# EAGLE board Beton Ajek - Dirouting Faris (EAGLE 9.6.2)
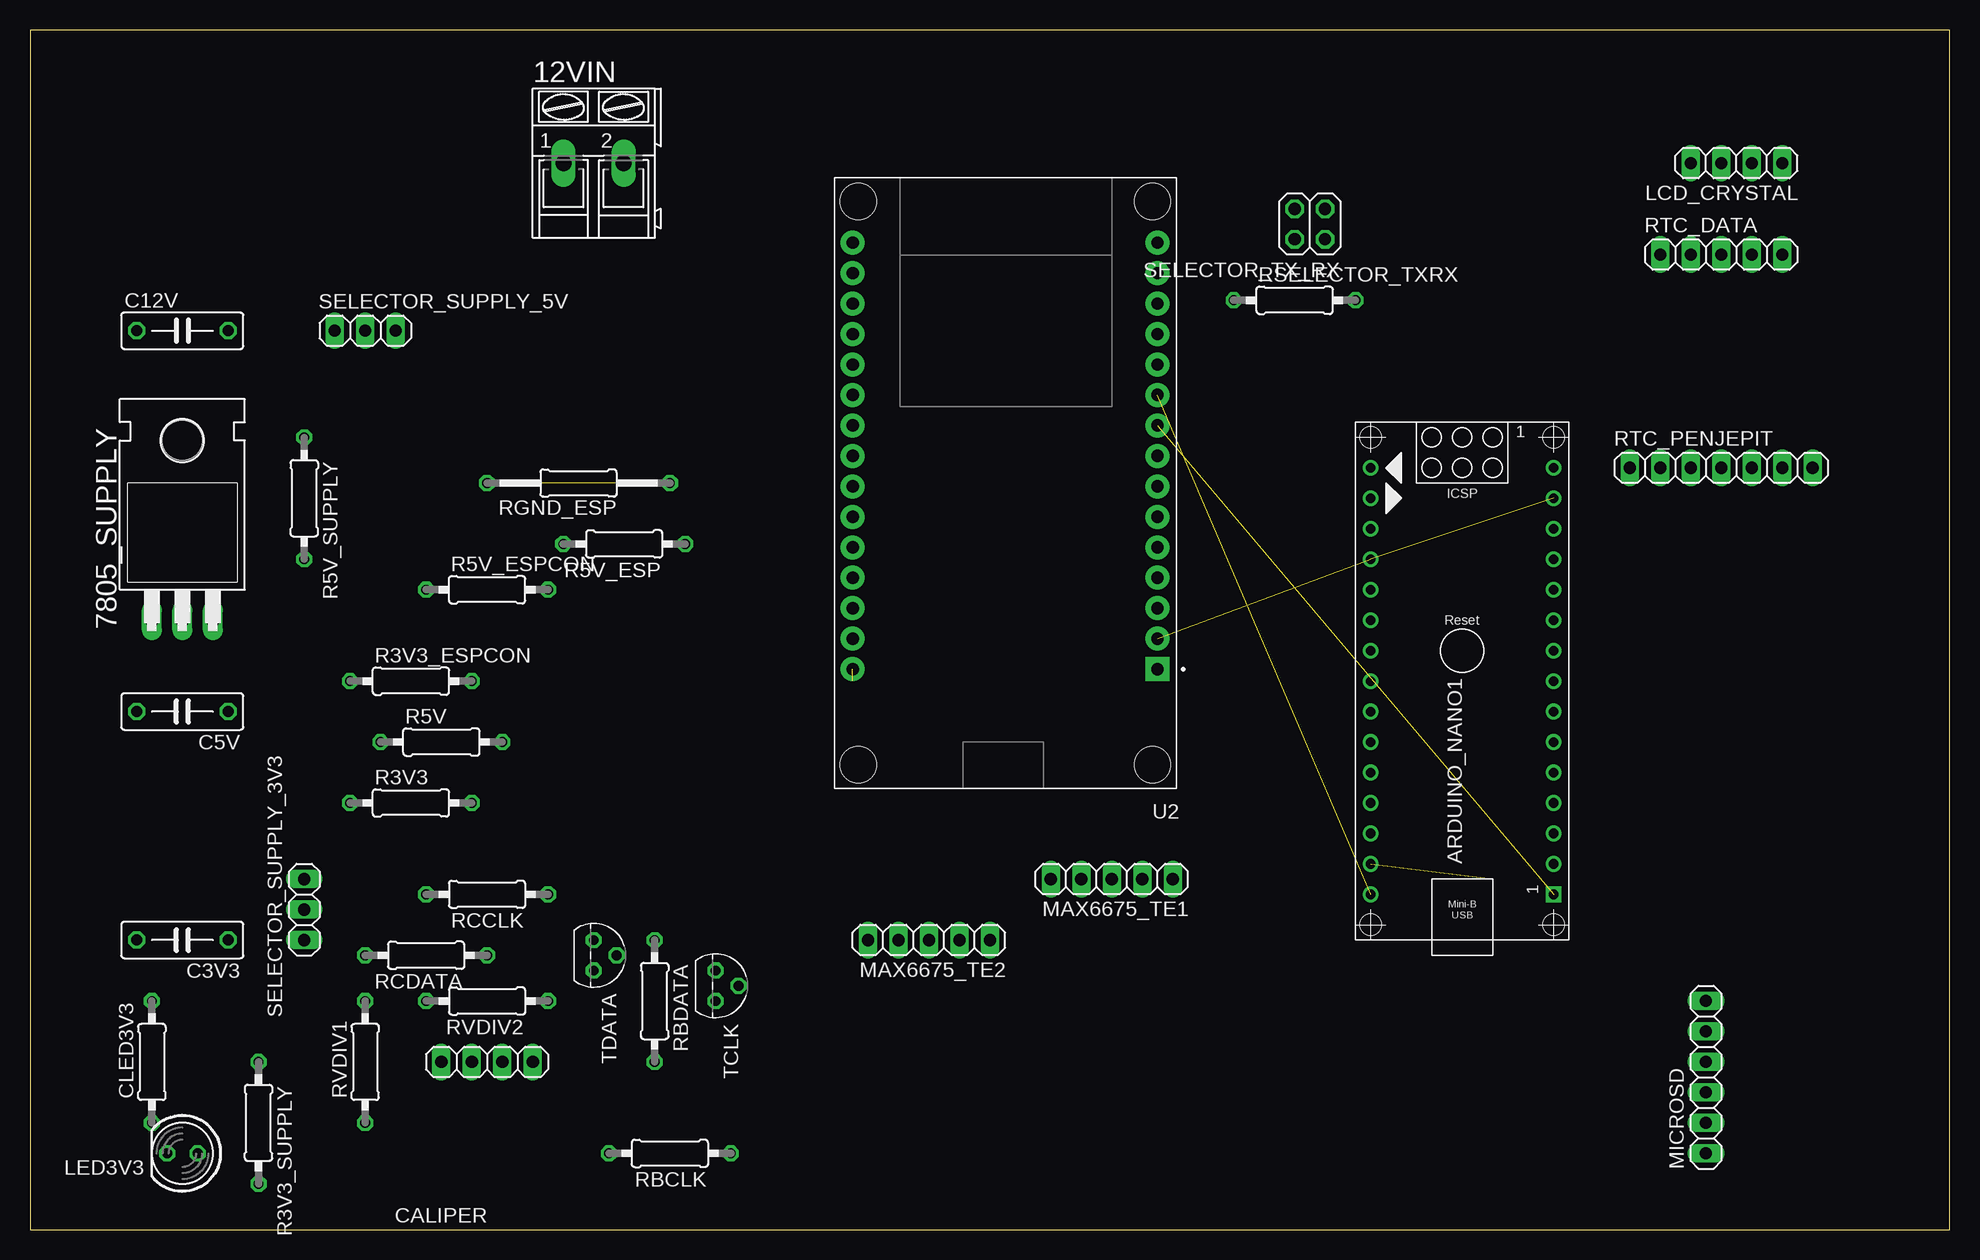
[diagram p0: board, top side]
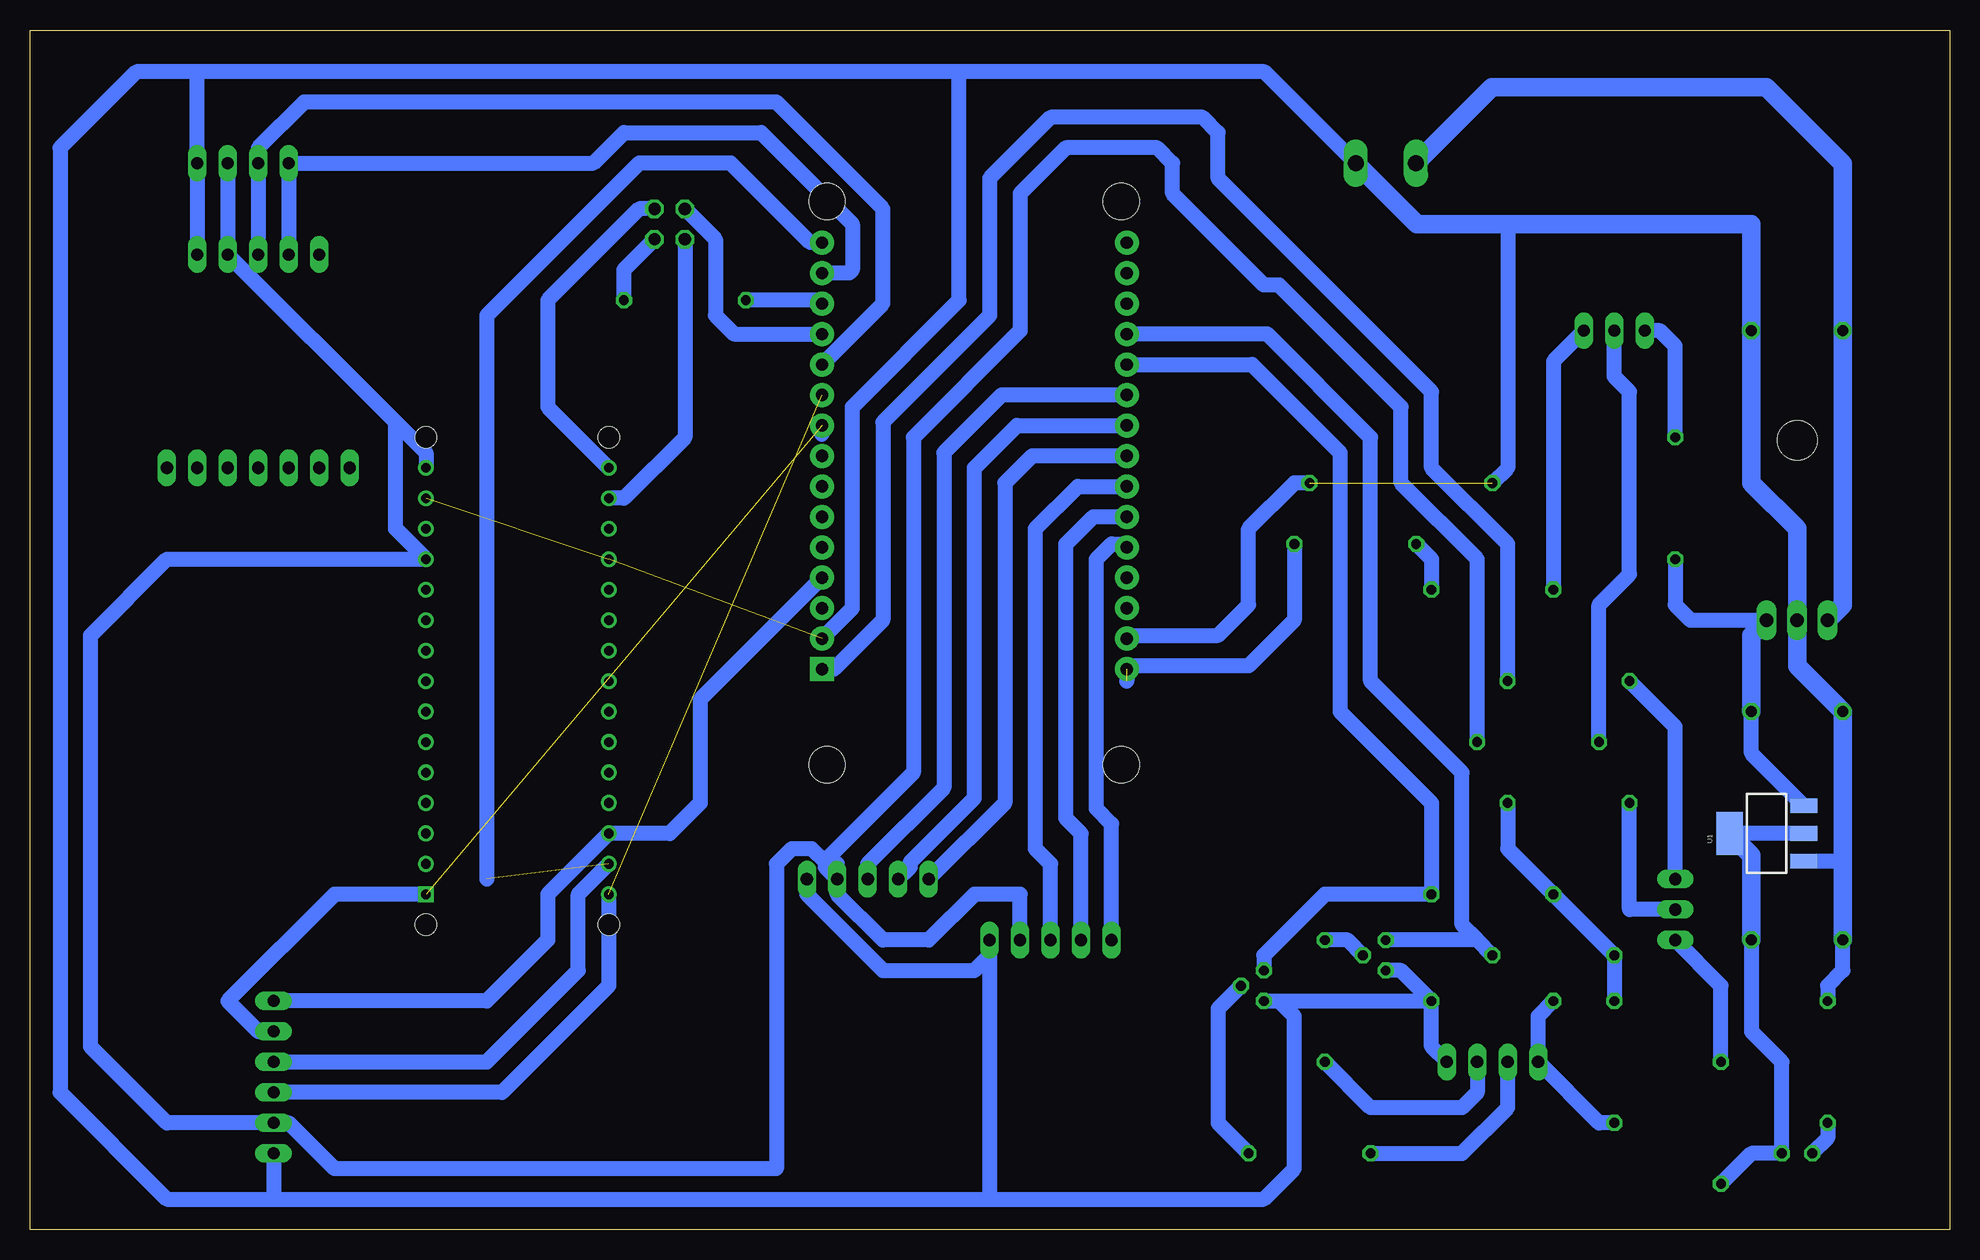
[diagram p1: board, bottom side, seen from below]

Size 160 x 100 mm. Coordinates in mm from the lower left corner, seen from the top.
Outline: 0,0 160,0 160,100 0,100 0,0
Copper layers (1*16): Top 0.035mm / dielectric 1.5mm / Bottom 0.035mm
Design rules "default": minimum track width 6mil, minimum drill 0.35mm, track to track 6mil, track to pad 6mil, pad to pad 6mil, via to via 6mil, smd to smd 6mil, copper to edge 40mil, drill to drill 6mil, minimum pad ring 10mil, minimum via ring 8mil, stop-mask expansion 4mil, vias tented up to drill 0mil, thermal gap 10mil

## Footprints (pad centres in the part's own frame; a part is rotated, then mirrored left to right if it is on the bottom)
AK300/2 = drill 1.321 long: 1 -2.515,0; 2 2.489,0
TO220H = drill 1.118 long: 1 -2.54,-10.16; 2 0,-10.16; 3 2.54,-10.16 | hole 3.302: 0,4.826
ARDUINO_NANO = drill 0.8 square: 1 -20.32,-7.62 | drill 0.8: 2 -17.78,-7.62; 3 -15.24,-7.62; 4 -12.7,-7.62; 5 -10.16,-7.62; 6 -7.62,-7.62; 7 -5.08,-7.62; 8 -2.54,-7.62; 9 0,-7.62; 10 2.54,-7.62; 11 5.08,-7.62; 12 7.62,-7.62; 13 10.16,-7.62; 14 12.7,-7.62; 15 15.24,-7.62; 16 15.24,7.62; 17 12.7,7.62; 18 10.16,7.62; 19 7.62,7.62; 20 5.08,7.62; 21 2.54,7.62; 22 0,7.62; 23 -2.54,7.62; 24 -5.08,7.62; 25 -7.62,7.62; 26 -10.16,7.62; 27 -12.7,7.62; 28 -15.24,7.62; 29 -17.78,7.62; 30 -20.32,7.62 | hole 1.778: -22.86,-7.62; -22.86,7.62; 17.78,7.62; 17.78,-7.62
C075-032X103 = drill 0.914 octagon: 1 -3.81,0; 2 3.81,0
1X04 = drill 1.016 long: 1 -3.81,0; 2 -1.27,0; 3 1.27,0; 4 3.81,0
0207/10 = drill 0.813 octagon: 1 -5.08,0; 2 5.08,0
LED5MM = drill 0.813 octagon: A -1.27,0; K 1.27,0
1X05 = drill 1.016 long: 1 -5.08,0; 2 -2.54,0; 3 0,0; 4 2.54,0; 5 5.08,0
1X06 = drill 1.016 long: 1 -6.35,0; 2 -3.81,0; 3 -1.27,0; 4 1.27,0; 5 3.81,0; 6 6.35,0
0207/15 = drill 0.813 octagon: 1 -7.62,0; 2 7.62,0
1X07 = drill 1.016 long: 1 -7.62,0; 2 -5.08,0; 3 -2.54,0; 4 0,0; 5 2.54,0; 6 5.08,0; 7 7.62,0
1X03 = drill 1.016 long: 1 -2.54,0; 2 0,0; 3 2.54,0
2X02 = drill 1.016 octagon: 1 -1.27,-1.27; 2 -1.27,1.27; 3 1.27,-1.27; 4 1.27,1.27
TO92 = drill 0.813 octagon: 1 1.27,0; 2 0,1.905; 3 -1.27,0
SOT223 = smd 1.219 x 2.235: 1 -2.311,-3.099; 2 0,-3.099; 3 2.311,-3.099 | smd 3.6 x 2.2: 4 0,3.099
MODULE_ESP32_DEVKIT_V1 = drill 1.02 pad 2 square: 1 -12.7,15.515 | drill 1.02 pad 2: 2 -12.7,12.975; 3 -12.7,10.435; 4 -12.7,7.895; 5 -12.7,5.355; 6 -12.7,2.815; 7 -12.7,0.275; 8 -12.7,-2.265; 9 -12.7,-4.805; 10 -12.7,-7.345; 11 -12.7,-9.885; 12 -12.7,-12.425; 13 -12.7,-14.965; 14 -12.7,-17.505; 15 -12.7,-20.045; 16 12.7,-20.045; 17 12.7,-17.505; 18 12.7,-14.965; 19 12.7,-12.425; 20 12.7,-9.885; 21 12.7,-7.345; 22 12.7,-4.805; 23 12.7,-2.265; 24 12.7,0.275; 25 12.7,2.815; 26 12.7,5.355; 27 12.7,7.895; 28 12.7,10.435; 29 12.7,12.975; 30 12.7,15.515 | hole 3: -12.28,-23.475; 12.23,-23.475; 12.23,23.475; -12.28,23.475

## Placement (x,y rotation side)
12VIN  [AK300/2]  46.99,88.9 0 top
7805_SUPPLY  7805T  [TO220H]  12.7,60.96 0 top
ARDUINO_NANO1  [ARDUINO_NANO]  119.38,48.26 90 top
C3V3  [C075-032X103]  12.7,24.13 180 top
C5V  [C075-032X103]  12.7,43.18 180 top
C12V  [C075-032X103]  12.7,74.93 0 top
CALIPER  [1X04]  38.1,13.97 0 top
CLED3V3  [0207/10]  10.16,13.97 90 top
LCD_CRYSTAL  [1X04]  142.24,88.9 180 top
LED3V3  [LED5MM]  12.7,6.35 180 top
MAX6675_TE1  [1X05]  90.17,29.21 180 top
MAX6675_TE2  [1X05]  74.93,24.13 180 top
MICROSD  [1X06]  139.7,12.7 90 top
R3V3  0R  [0207/10]  31.75,35.56 0 top
R3V3_ESPCON  0R  [0207/10]  31.75,45.72 0 top
R3V3_SUPPLY  0R  [0207/10]  19.05,8.89 270 top
R5V  0R  [0207/10]  34.29,40.64 0 top
R5V_ESP  0R  [0207/10]  49.53,57.15 180 top
R5V_ESPCON  0R  [0207/10]  38.1,53.34 0 top
R5V_SUPPLY  0R  [0207/10]  22.86,60.96 270 top
RBCLK  [0207/10]  53.34,6.35 180 top
RBDATA  [0207/10]  52.07,19.05 270 top
RCCLK  [0207/10]  38.1,27.94 180 top
RCDATA  [0207/10]  33.02,22.86 180 top
RGND_ESP  0R  [0207/15]  45.72,62.23 180 top
RSELECTOR_TXRX  0R  [0207/10]  105.41,77.47 0 top
RTC_DATA  [1X05]  140.97,81.28 0 top
RTC_PENJEPIT  [1X07]  140.97,63.5 0 top
RVDIV1  [0207/10]  27.94,13.97 90 top
RVDIV2  [0207/10]  38.1,19.05 180 top
SELECTOR_SUPPLY_3V3  [1X03]  22.86,26.67 90 top
SELECTOR_SUPPLY_5V  [1X03]  27.94,74.93 0 top
SELECTOR_TX_RX  [2X02]  106.68,83.82 180 top
TCLK  BC547  [TO92]  57.15,20.32 270 top
TDATA  BC547  [TO92]  46.99,22.86 270 top
U1  [SOT223]  15.24,33.02 90 bottom
U2  ESP32-DEVKIT-V1  [MODULE_ESP32_DEVKIT_V1]  81.28,62.23 180 top

## Library data of the parts
12VIN = con-ptr500
7805_SUPPLY = adafruit
ARDUINO_NANO1 = ArduinoNanoV30
C3V3 C5V C12V = rcl; SPICEPREFIX: C
CALIPER LCD_CRYSTAL MAX6675_TE1 MAX6675_TE2 MICROSD RTC_DATA RTC_PENJEPIT SELECTOR_SUPPLY_3V3 SELECTOR_SUPPLY_5V SELECTOR_TX_RX = pinhead
CLED3V3 R3V3 R3V3_ESPCON R3V3_SUPPLY R5V R5V_ESP R5V_ESPCON R5V_SUPPLY RBCLK RBDATA RCCLK RCDATA RGND_ESP RSELECTOR_TXRX RVDIV1 RVDIV2 = rcl; SPICEPREFIX: R
LED3V3 = led
TCLK TDATA = transistor
U1 = SparkFun-IC-Power; PROD_ID: VREG-08170
U2 = ESP32-DEVKIT-V1; AVAILABILITY: Not in stock; DESCRIPTION: Dual core, Wi-Fi: 2.4 GHz up to 150 Mbits/s,BLE (Bluetooth Low Energy) and legacy Bluetooth, 32 bits, Up to 240 MHz; MF: Do it; MP: ESP32-DEVKIT-V1; PACKAGE: None; PRICE: None

## Nets
1V5: CALIPER.1 RVDIV1.1 RVDIV2.2
3V3: R3V3.2 RCCLK.2 RCDATA.2 RVDIV1.2
3V3_ESP: R3V3_ESPCON.2 U2.1
3V3_SUPPLY: C3V3.1 LED3V3.A R3V3_SUPPLY.2 U1.2 U1.4
5V: ARDUINO_NANO1.12 ARDUINO_NANO1.15 LCD_CRYSTAL.2 MAX6675_TE1.2 MAX6675_TE2.2 MICROSD.2 R5V.2 RTC_DATA.4
5V_ESP: R5V_ESP.2 R5V_ESPCON.2
5V_SUPPLY: 7805_SUPPLY.3 C5V.1 R5V_SUPPLY.2 U1.3
CHIP_SELECT_USD: ARDUINO_NANO1.28 MICROSD.6 U2.4
CLK_CALIPER: RCCLK.1 TCLK.3 U2.20
CLK_IN: CALIPER.2 RBCLK.2
CS_TE1: MAX6675_TE1.4 U2.22
CS_TE2: MAX6675_TE2.4 U2.25
DATA_CALIPER: RCDATA.1 TDATA.3 U2.19
DATA_IN: CALIPER.3 RBDATA.2
GND: 12VIN.2 7805_SUPPLY.2 ARDUINO_NANO1.14 ARDUINO_NANO1.19 C3V3.2 C5V.2 C12V.2 CALIPER.4 CLED3V3.2 LCD_CRYSTAL.1 MAX6675_TE1.1 MAX6675_TE2.1 MICROSD.1 RGND_ESP.1 RGND_ESP.2 RTC_DATA.5 RVDIV2.1 TCLK.1 TDATA.1 U1.1 U2.2 U2.29
MISO_USD: ARDUINO_NANO1.30 MICROSD.3 U2.10
MOSI_USD: ARDUINO_NANO1.29 MICROSD.4 U2.15
N$1: 12VIN.1 7805_SUPPLY.1 C12V.1
N$2: RBCLK.1 TCLK.2
N$4: RSELECTOR_TXRX.2 SELECTOR_TX_RX.2
N$6: R5V_ESP.1 U2.30
N$7: R5V.1 SELECTOR_SUPPLY_5V.2
N$8: U2.16
N$9: U2.17
N$10: U2.18
N$11: R5V_SUPPLY.1 SELECTOR_SUPPLY_5V.1
N$12: U2.5
N$13: CLED3V3.1 LED3V3.K
N$14: R5V_ESPCON.1 SELECTOR_SUPPLY_5V.3
N$15: R3V3.1 SELECTOR_SUPPLY_3V3.2
N$16: R3V3_SUPPLY.1 SELECTOR_SUPPLY_3V3.1
N$17: U2.8
N$18: RBDATA.1 TDATA.2
N$19: U2.27
N$20: U2.28
N$21: R3V3_ESPCON.1 SELECTOR_SUPPLY_3V3.3
N$25: U2.3
N$39: U2.7
N$40: U2.6
N$52: RTC_DATA.1
RX_ESP: SELECTOR_TX_RX.3 U2.12
RX_NANO: ARDUINO_NANO1.17 SELECTOR_TX_RX.4
SCK_TE1: MAX6675_TE1.3 U2.21
SCK_TE2: MAX6675_TE2.3 U2.24
SCK_USD: ARDUINO_NANO1.1 MICROSD.5 U2.9
SCL: LCD_CRYSTAL.4 RTC_DATA.2 U2.14
SDA: LCD_CRYSTAL.3 RTC_DATA.3 U2.11
SO_TE1: MAX6675_TE1.5 U2.23
SO_TE2: MAX6675_TE2.5 U2.26
TX_ESP: RSELECTOR_TXRX.1 U2.13
TX_NANO: ARDUINO_NANO1.16 SELECTOR_TX_RX.1

## Tracks (layer width: path | path; a pad name or v marks a point on that pad's centre or on a via)
1V5
  Bottom 1.27: RVDIV1.1 29.21,8.89 CALIPER.1 34.29,17.78 RVDIV2.2
3V3
  Bottom 1.27: RVDIV1.2 RCDATA.2 RCCLK.2 36.83,31.75 R3V3.2
3V3_ESP
  Bottom 1.27: R3V3_ESPCON.2 36.83,57.15 43.18,63.5 43.18,69.85 60.96,87.63 60.96,91.44 62.23,92.71 74.93,92.71 80.01,87.63 80.01,76.2 88.9,67.31 88.9,50.8 92.98,46.72 U2.1
3V3_SUPPLY
  Bottom 1.27: U1.2 U1.4 | C3V3.1 16.51,16.51 13.97,13.97 LED3V3.A 16.51,6.35 R3V3_SUPPLY.2
  Bottom 1.524: C3V3.1 16.51,31.19 U1.4
5V
  Bottom 1.27: MAX6675_TE2.2 77.47,27.94 81.28,27.94 85.09,24.13 88.9,24.13 92.71,27.94 MAX6675_TE1.2 | 92.71,30.48 MAX6675_TE1.2 | MAX6675_TE1.2 93.7,30.2 93.7,30.61 | 93.7,30.61 94.84,31.75 96.52,31.75 97.79,30.48 97.79,5.08 134.62,5.08 138.43,8.89 MICROSD.2 148.59,8.89 154.94,15.24 154.94,49.53 148.59,55.88 ARDUINO_NANO1.12 129.54,58.42 129.54,67.31 | R5V.2 39.37,55.88 45.72,62.23 45.72,68.58 55.88,78.74 57.15,78.74 64.77,86.36 64.77,88.9 66.04,90.17 73.66,90.17 77.47,86.36 77.47,74.93 86.36,66.04 86.36,38.1 93.7,30.76 93.7,30.61 | LCD_CRYSTAL.2 RTC_DATA.4 129.54,67.31 | 129.54,67.31 127,64.77 ARDUINO_NANO1.15
5V_ESP
  Bottom 1.27: R5V_ESP.2 43.18,55.88 R5V_ESPCON.2
5V_SUPPLY
  Bottom 1.27: U1.3 16.51,39.7 C5V.1 | R5V_SUPPLY.2 22.86,52.07 21.59,50.8 7805_SUPPLY.3
  Bottom 1.524: C5V.1 16.51,49.53 7805_SUPPLY.3
CHIP_SELECT_USD
  Bottom 1.27: MICROSD.6 121.92,19.05 116.84,24.13 116.84,27.94 ARDUINO_NANO1.28 106.68,33.02 104.14,35.56 104.14,44.17 U2.4
CLK_CALIPER
  Bottom 1.27: TCLK.3 57.15,22.86 52.07,27.94 RCCLK.1 43.18,35.56 50.8,43.18 50.8,64.77 58.15,72.11 U2.20
CLK_IN
  Bottom 1.27: RBCLK.2 40.64,6.35 36.83,10.16 CALIPER.2
CS_TE1
  Bottom 1.27: MAX6675_TE1.4 86.64,30.2 86.64,30.61 81.28,35.97 81.28,63.5 77.75,67.03 U2.22
CS_TE2
  Bottom 1.27: U2.25 71.39,59.41 73.66,57.15 73.66,34.29 72.39,33.02 MAX6675_TE2.4
DATA_CALIPER
  Bottom 1.27: RCDATA.1 39.37,24.13 | 39.37,24.13 TDATA.3 | 39.37,24.13 40.64,25.4 40.64,38.1 48.26,45.72 48.26,66.04 56.88,74.66 U2.19
DATA_IN
  Bottom 1.27: CALIPER.3 39.37,11.43 40.64,10.16 48.26,10.16 RBDATA.2
GND  (3 unrouted)
  Bottom 1.27: U1.1 9.12,30.71 8.89,30.48 | CLED3V3.2 10.16,20.32 8.89,21.59 C3V3.2 | CALIPER.4 43.18,15.24 RVDIV2.1 | RVDIV2.1 45.72,21.59 TDATA.1 | TCLK.1 55.88,19.05 | 55.88,19.05 RVDIV2.1 | 12VIN.2 57.1,96.52 82.55,96.52 | 82.55,96.52 146.05,96.52 | 146.05,96.52 151.13,96.52 157.48,90.17 157.48,11.43 148.59,2.54 139.7,2.54 | MAX6675_TE1.1 95.25,27.94 88.9,21.59 81.28,21.59 80.01,22.86 MAX6675_TE2.1 80.01,2.54 | 139.7,2.54 80.01,2.54 | 80.01,2.54 57.15,2.54 54.61,5.08 54.61,17.78 55.88,19.05 | 36.83,83.82 36.83,63.5 RGND_ESP.2 | U2.29 68.31,49.53 60.96,49.53 58.42,52.07 58.42,58.42 54.61,62.23 RGND_ESP.1 | RTC_DATA.5 LCD_CRYSTAL.1 146.05,96.52 | U2.2 91.44,51.8 91.44,68.58 82.55,77.47 82.55,96.52 | MICROSD.1 139.7,2.54
  Bottom 1.524: 12VIN.2 44.4,83.82 36.83,83.82 16.51,83.82 C12V.2 16.51,62.23 12.7,58.42 7805_SUPPLY.2 12.7,46.99 C5V.2 8.89,30.48 C3V3.2
MISO_USD  (1 unrouted)
  Bottom 1.27: ARDUINO_NANO1.30 111.76,20.32 120.65,11.43 MICROSD.3
MOSI_USD  (1 unrouted)
  Bottom 1.27: U2.15 94.97,82.28 101.6,88.9 109.22,88.9 121.92,76.2 121.92,29.21 | MICROSD.4 121.92,13.97 114.3,21.59 114.3,27.94 ARDUINO_NANO1.29
N$1
  Bottom 1.524: 12VIN.1 38.12,95.25 15.27,95.25 8.89,88.88 C12V.1 8.89,52.07 7805_SUPPLY.1
N$2
  Bottom 1.27: TCLK.2 60.96,18.41 60.96,8.89 RBCLK.1
N$4
  Bottom 1.27: RSELECTOR_TXRX.2 110.49,80.01 SELECTOR_TX_RX.2
N$6  (1 unrouted)
  Bottom 1.27: R5V_ESP.1 54.61,50.8 58.42,46.99 68.58,46.99 68.58,45.72
N$7
  Bottom 1.27: SELECTOR_SUPPLY_5V.2 27.94,71.12 26.67,69.85 26.67,54.61 29.21,52.07 R5V.1
N$11
  Bottom 1.27: R5V_SUPPLY.1 22.86,73.66 24.13,74.93 SELECTOR_SUPPLY_5V.1
N$13
  Bottom 1.27: CLED3V3.1 10.16,7.62 LED3V3.K
N$14
  Bottom 1.27: SELECTOR_SUPPLY_5V.3 33.02,72.39 R5V_ESPCON.1
N$15
  Bottom 1.27: SELECTOR_SUPPLY_3V3.2 26.67,26.67 R3V3.1
N$16
  Bottom 1.27: R3V3_SUPPLY.1 19.05,20.32 SELECTOR_SUPPLY_3V3.1
N$18
  Bottom 1.27: TDATA.2 50.16,24.13 RBDATA.1
N$21
  Bottom 1.27: SELECTOR_SUPPLY_3V3.3 22.86,41.91 R3V3_ESPCON.1
RX_ESP
  Bottom 1.27: SELECTOR_TX_RX.3 102.87,82.55 102.87,76.2 101.33,74.66 U2.12
RX_NANO
  Bottom 1.27: ARDUINO_NANO1.17 110.49,60.96 105.41,66.04 SELECTOR_TX_RX.4
SCK_TE1
  Bottom 1.27: U2.21 79.02,69.58 83.82,64.77 83.82,36.83 90.17,30.48 MAX6675_TE1.3
SCK_TE2
  Bottom 1.27: MAX6675_TE2.3 74.93,30.48 76.2,31.75 76.2,58.42 72.67,61.95 U2.24
SCK_USD  (1 unrouted)
  Bottom 1.27: U2.9 93.98,66.28 | MICROSD.5 140.97,16.51 143.51,19.05 134.62,27.94 ARDUINO_NANO1.1
SCL
  Bottom 1.27: U2.14 91.72,79.73 91.44,80.01 91.44,83.82 99.06,91.44 110.49,91.44 113.03,88.9 LCD_CRYSTAL.4 RTC_DATA.2
SDA
  Bottom 1.27: U2.11 88.9,77.19 88.9,85.09 97.79,93.98 137.16,93.98 140.97,90.17 LCD_CRYSTAL.3 RTC_DATA.3
SO_TE1
  Bottom 1.27: U2.23 76.47,64.5 78.74,62.23 78.74,35.56 MAX6675_TE1.5
SO_TE2
  Bottom 1.27: MAX6675_TE2.5 69.85,33.83 71.12,35.1 71.12,55.88 69.85,57.15 68.86,57.15 U2.26
TX_ESP
  Bottom 1.27: U2.13 94.25,77.47 RSELECTOR_TXRX.1
TX_NANO
  Bottom 1.27: SELECTOR_TX_RX.1 109.22,85.09 116.84,77.47 116.84,68.58 ARDUINO_NANO1.16